# Altium PCB Arduino mini.PcbDoc
Units mil, origin at the board's own origin, x right, y up, seen from the top; angles counter-clockwise.
Board outline 805 x 805 mil, 2 copper layers (Top Layer, Bottom Layer); 9 components, 29 nets, 69 pads, 20 vias.
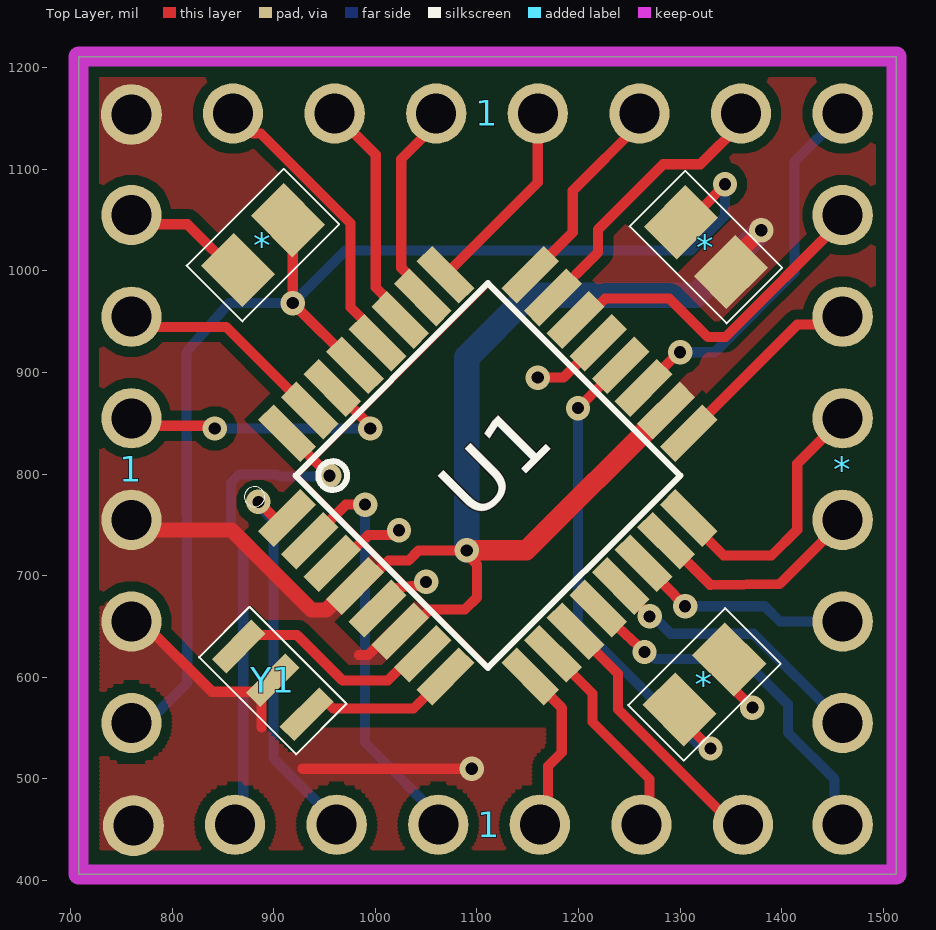
[diagram p0: Top Layer view]
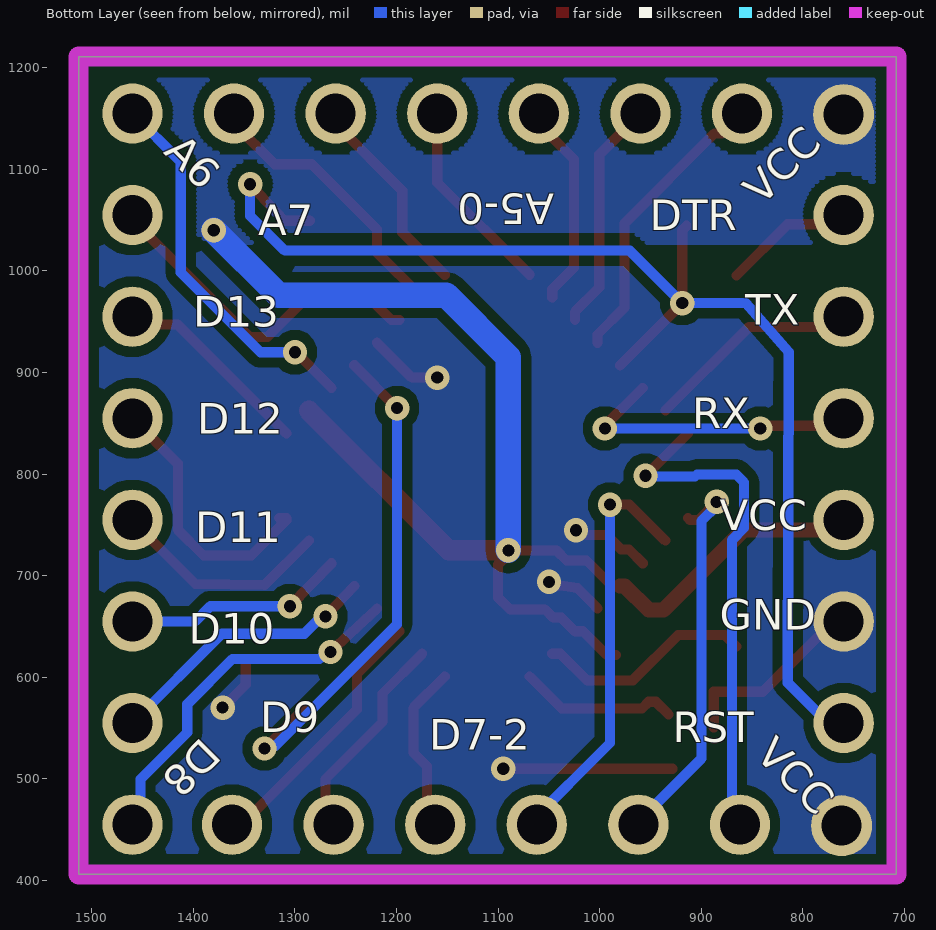
[diagram p1: Bottom Layer view, seen from below]
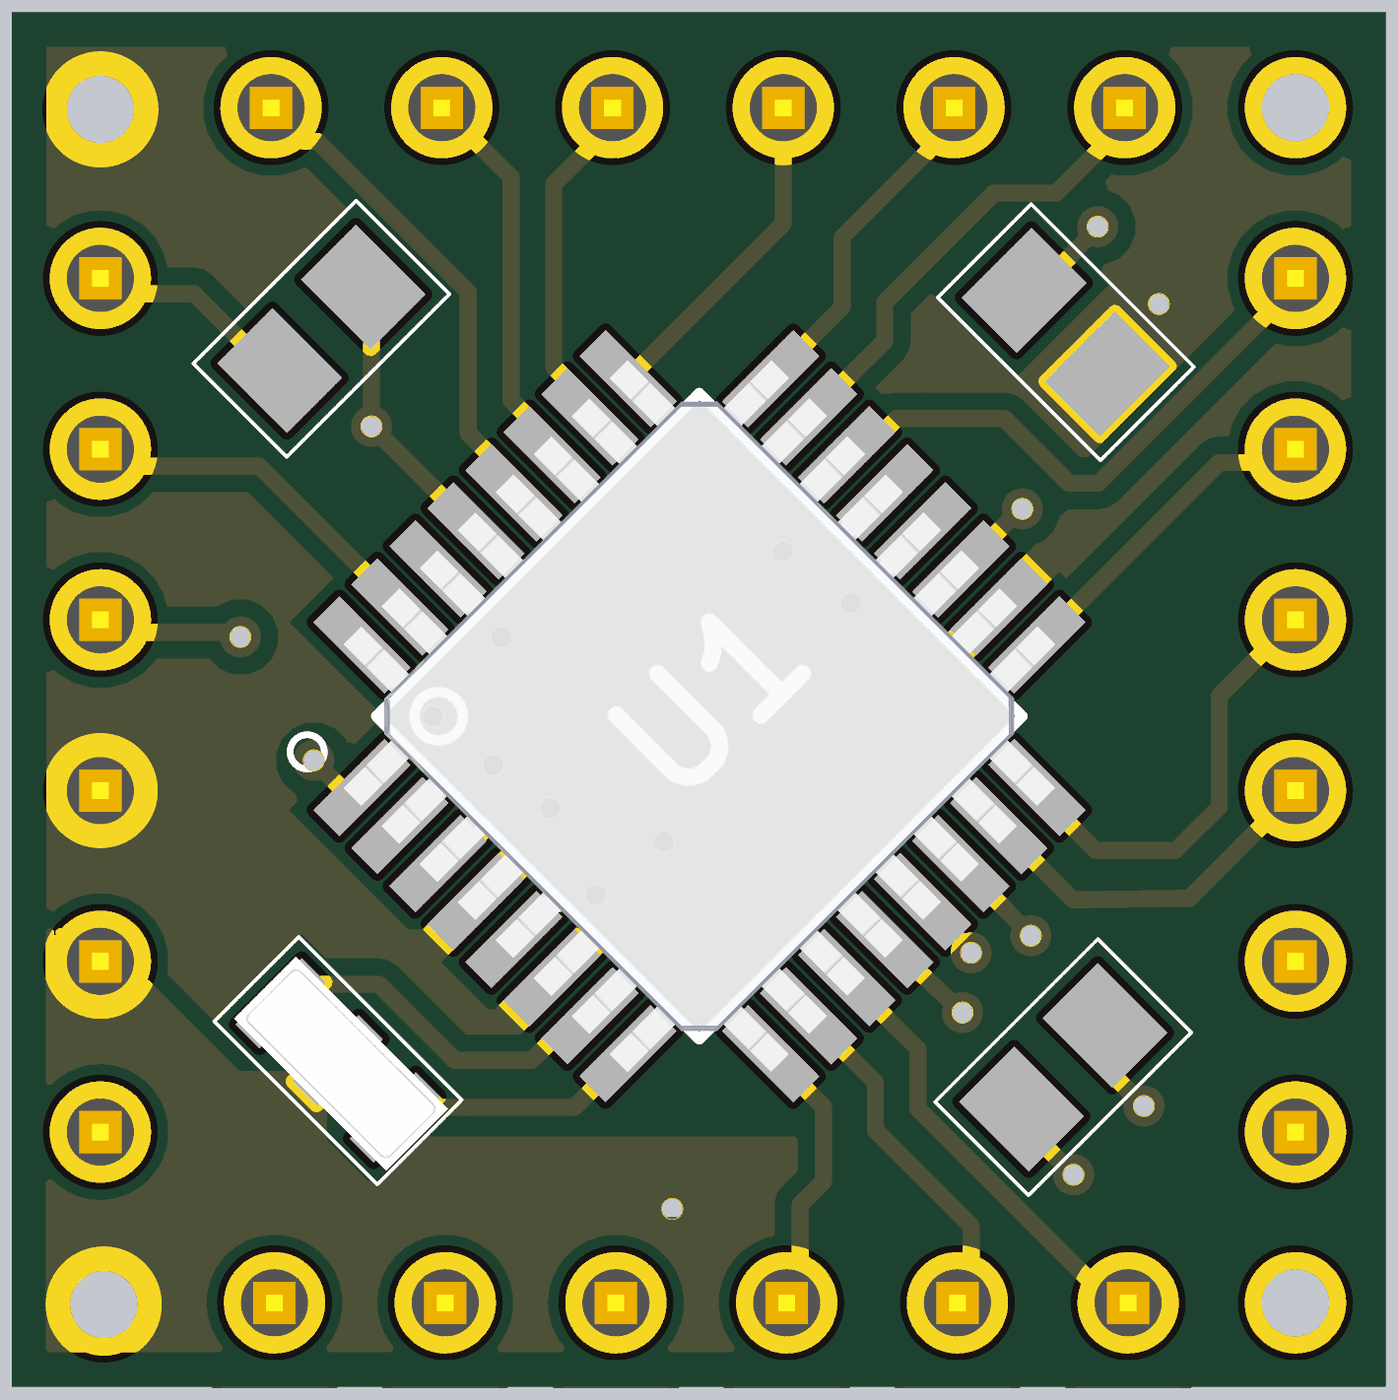
[diagram p2: 3D render of the assembled board from above, using the file's embedded part models]

## Layer stack, top to bottom
Top Solder: solder mask 1, SM-002, Dk 4
Top Layer: signal copper 1.4
Dielectric 1: dielectric 12.6, FR-4, Dk 4.8
Bottom Layer: signal copper 1.4
Bottom Solder: solder mask 1, SM-002, Dk 4

## Board outline
708,406 708,1211 1513,1211 1513,406

## Design rules (kind name [scope] priority, off if disabled: settings)
Clearance [All] p1: gap=10 ignorepadtopadclearanceinfootprint=TRUE except(0: Arc-Hole Track-Hole SMDPad-Hole THPad-Hole Via-Hole Fill-Hole Poly-Hole Region-Hole Text-Hole; 15: Arc-Arc Arc-Track Track-Track)
ComponentClearance [All] p1 off: gap=10 collisioncheckmode=3 verticalgap=10 showdistances=FALSE
Height [All] p1 off: minheight=0 maxheight=1000 prefheight=500
PolygonConnect [All] p1: connectstyle=Direct reliefconductorwidth=10 reliefentries=4 polygonreliefangle="90 Angle" airgapwidth=10
RoutingVias [All] p1: holewidth=28 width=50 viastyle="Through Hole" minholewidth=28 minwidth=50 maxholewidth=28 maxwidth=50
SolderMaskExpansion [All] p1: expansion=4 istentingtop=FALSE
Width [All] p1: maxlimit=30 minlimit=10 preferedwidth=10 minimp=50.000000 maximp=50.000000 favimp=50.000000
28 further rules are at their usual default settings.

## Classes and differential pairs
component class Arduino最小开发板: 1 * U1 Y1

## Components (designator, comment, footprint, x,y, rotation, side; value= is the part's Value field where it differs from the comment)
1 "JP" JP 1360,1155 r180 top
1 "JP" JP 760,1055 r270 top
1 "JP" JP 862,455 r0 top
* "JP-8" JP-8 1460,1155 r270 top
* "电容" 0805 1324,593 r225 top
* "电阻" 0805 1325.5,1023.5 r315 top
* "电容" 0805 889.5,1025.5 r45 top
U1 "ATMEGA328P-AU" Atmega 1110.84,798.57 r45 top
Y1 "8/16MHz" CSTCE 865.59,630.41 r315 top

## Footprints (in the part's own frame and the unit in brackets; to place one, negate y for a bottom-side part, rotate by r counter-clockwise, add the part's x,y. Pads: shape width x height; smd on the part's side, far side on the other; paste and mask are expansions set on the pad)
0805 [mm]
  rect 1.16x1.47 smd: 1(-0.88,0) 2(0.88,0)
  silkscreen extent -1.71,-0.98 1.71,0.98
Atmega [mm]
  rect 1.5x0.55 smd: 1(-4.3,2.8) 2(-4.3,2) 3(-4.3,1.2) 4(-4.3,0.4) 5(-4.3,-0.4) 6(-4.3,-1.2) 7(-4.3,-2) 8(-4.3,-2.8) 17(4.3,-2.8) 18(4.3,-2) 19(4.3,-1.2) 20(4.3,-0.4) 21(4.3,0.4) 22(4.3,1.2) 23(4.3,2) 24(4.3,2.8)
  rect 0.55x1.5 smd: 9(-2.8,-4.3) 10(-2,-4.3) 11(-1.2,-4.3) 12(-0.4,-4.3) 13(0.4,-4.3) 14(1.2,-4.3) 15(2,-4.3) 16(2.8,-4.3) 25(2.8,4.3) 26(2,4.3) 27(1.2,4.3) 28(0.4,4.3) 29(-0.4,4.3) 30(-1.2,4.3) 31(-2,4.3) 32(-2.8,4.3)
  silkscreen extent -4.75,-3.4 3.4,4, body extent -4.5,-4.5 4.5,4.5, height 1.27
CSTCE [mil]
  rect 20x55 smd: 1(0,0) 2(47.24,0) 3(94.49,0)
  silkscreen extent -20,-35 115,35, body extent -13,-26 113,26, height 28
JP [mm]
  round 1.508 hole 1: 1(0,0) 2(2.54,0) 3(5.08,0) 4(7.62,0) 5(10.16,0) 6(12.7,0)
  body extent -1.27,-1.27 13.97,1.27, height 2.59
JP-8 [mm]
  round 1.508 hole 1: 1(0,0) 2(2.54,0) 3(5.08,0) 4(7.62,0) 5(10.16,0) 6(12.7,0) 7(15.24,0) 8(17.78,0)
  body extent 1.27,-1.27 16.51,1.27, height 2.59

## Part data
U1: "AVR AVRÂ® ATmega Microcontroller IC 8-Bit 20MHz 32KB _16K x 16_ FLASH 32-TQFP _7x7_", Package="TQFP-32 Microchip", Availability=Unavailable, MF=Microchip, MP=ATMEGA328P-AU, Price=None, SnapEDA_Link=https://www.snapeda.com/parts/ATMEGA328P-AU/Microchip/view-part/44280/?ref=snap
Y1: library part 晶振-3Pin, "村田贴片"

## Free pads (board coordinates)
  round 60 hole 39.37: 2(760,1154) 2(762,454)

## Via types
v1: diameter 24, hole 12, Top Layer to Bottom Layer, tented both sides, 20 vias

## Nets (pads, with @x,y where several pads share a name; then routed paths per layer and width w, separated by ;. In a path a pad name is that pad's centre, name@x,y a point inside that pad or via, vN(x,y) a via of type N, cw(c..) or ccw(c..) an arc to the next point about the centre after c; other vN are vias at no path point)
A0: 1.1@1360,1155 U1.23 | length 279.1
  Top Layer w10: U1.23 1219.4,1018.48 1219.4,1040.89 1283.5,1105 1320,1105 1360,1145 1.1@1360,1155
A1: 1.2@1260,1155 U1.24 | length 203.3
  Top Layer w10: U1.24 1194.4,1038.02 1194.4,1079.08 1260,1144.68 1.2@1260,1155
A2: 1.3@1160,1155 U1.25 | length 196.4
  Top Layer w10: U1.25 1160,1087.14 1.3@1160,1155
A3: 1.4@1060,1155 U1.26 | length 204.1
  Top Layer w10: U1.26 1046.81,981.97 1025.55,1003.24 1025.55,1110.23 1060,1144.68 1.4@1060,1155
A4: 1.5@960,1155 U1.27 | length 230
  Top Layer w10: 1.5@960,1155 1000.55,1114.45 1000.55,983.7 1024.54,959.7 U1.27
A5: 1.6@860,1155 U1.28 | length 288.9
  Top Layer w10: 1.6@860,1155 879.76,1135.24 887.26,1135.24 975.55,1046.95 975.55,964.15 1002.27,937.43 U1.28
A6: *.1@1460,1155 U1.19 | length 363.8
  Top Layer w10: U1.19 v1@1294.08,915
  Bottom Layer w10: v1(1300,920) 1334,920 1412.5,998.5 1412.5,1107.5 *.1@1460,1155
A7: *.2@1460,1055 U1.22 | length 339.8
  Top Layer w10: U1.22 1205.16,951.69 1226.42,972.95 1289.39,972.95 1327.34,935 1344.68,935 1460,1050.32 *.2@1460,1055
D2: 1.1@862,455 U1.32 | length 512.3
  Top Layer w10: U1.32 v1(955,798.52)
  Bottom Layer w10: 1.1@870,445 870,735 858,747 858,791.96 865.75,799.71 904.34,799.71 906.23,797.81 954.3,797.81 v1(955,798.52)
D3: 1.2@962,455 U1.1 | length 394.4
  Top Layer w10: v1(885,772.71) 902.92,754.79 911.16,754.79 U1.1
  Bottom Layer w10: v1(885,772.71) 885,768.92 900,753.92 900,520 1.2@970,450
D4: 1.3@1062,455 U1.2 | length 417.4
  Top Layer w10: U1.2 970.92,770 v1@980,770
  Bottom Layer w10: v1(990,770) 990,535.32 1070,455.31 1.3@1070,445
D5: 1.4@1162,455 U1.9 | length 174.3
  Top Layer w10: U1.9 1183.52,570 1183.52,526.1 1170,512.58 1.4@1170,445
D6: 1.5@1262,455 U1.10 | length 217.6
  Top Layer w10: U1.10 1213.89,584.16 1213.89,556.11 1270,500 1.5@1270,445
D7: 1.6@1362,455 U1.11 | length 276.5
  Top Layer w10: U1.11 1238.89,603.71 1238.89,568.6 1342.74,464.76 1350.24,464.76 1.6@1370,445
D8: *.8 U1.12 | length 365.8
  Top Layer w10: U1.12 v1(1265,625)
  Bottom Layer w10: v1(1265,625) 1268.79,625 1275.79,618 1361.64,618 1406.1,573.55 1406.1,545.71 1452.12,499.69 1452.12,462.88 *.8
D9: *.7 U1.13 | length 274.7
  Top Layer w10: U1.13 v1(1270,660)
  Bottom Layer w10: v1(1270,660) 1273.79,660 1290.79,643 1372,643 *.7
D10: *.6 U1.14 | length 222.5
  Top Layer w10: U1.14 v1(1305,670)
  Bottom Layer w10: v1@1306.68,671.68 v1(1305,670) 1383.32,670 1398.32,655 *.6
D11/MOSI: *.5 U1.15 | length 220.9
  Top Layer w10: U1.15 1329.77,691 1398,691.95 1460,753.95 *.5
  Bottom Layer w10: *.5@1458.32,753.32 *.5
D12/MISO: *.4 U1.16 | length 269.4
  Top Layer w10: U1.16@1315.81,756.81 U1.16 1308.5,754.5 1343,720 1390,720 1415.32,745.32 1415.32,810.32 *.4
D13/SCK: *.3 U1.17 | length 199
  Top Layer w10: U1.17 1415.32,947.15 1452.15,947.15 *.3
DTR: 1.1@760,1055 *.1@865,1001 | length 130.1
  Top Layer w10: 1.1@760,1055 769,1046 815,1046 *.1@865.5,995.5
GND: 1.5@760,655 *.1@1348.5,617.5 pad.2@762,454 U1.3 U1.5 U1.21 Y1.2 | length 634.7
  Top Layer w10: 1.5@756.77,645 755,645 1.5@760.49,650.49 ; 1.5@760,655 770.32,655 839.45,585.86 887.86,585.86 887.86,550.73 ; 928.6,510 v1(1095,510) ; U1.3 971.32,725.86 978.83,725.86 992.97,740 v1@1015,740 ; U1.5 U1.5@1006.64,672.36 ; U1.5@1011,677 U1.5@1006.64,672.36 ; v1@1041.75,690 1043.07,691.32 1047.32,691.32 v1(1050,694) ; v1@1045.19,691.32 1022,688 U1.5@1006.64,672.36 ; v1(1160,895) 1185,895 U1.21 ; *.1@1348.5,617.5 1348.5,592.96 v1(1371.23,570.23)
  other v1: 1023.4,744.71
Net*_2: *.2@1299.5,568.5 U1.20 | length 510.3
  Top Layer w10: v1(1199.54,865) U1.20 ; *.2@1290.5,570.5 1290.5,569.5 v1(1330,530)
  Bottom Layer w10: v1(1199.54,865) 1199.54,652.27 1319.14,532.68 1327.32,532.68 v1(1330,530)
NetU1_7: U1.7 Y1.1 | length 215.1
  Top Layer w10: Y1.1 876.73,641.54 923.06,641.54 967.6,597 1012.61,597 1038.8,623.19 U1.7
NetU1_8: U1.8 Y1.3 | length 157.6
  Top Layer w10: Y1.3 944.78,575.97 951.85,575.97 958.39,569.43 1037.6,569.43 U1.8
RST: 1.6@760,555 *.1@1301,1048 *.2@914,1050 U1.29 | length 1263.3
  Top Layer w10: *.2@914.5,1044.5 918.81,1040.18 v1(918.81,968.33) U1.29 ; *.1@1285.5,1049.5 1310.72,1049.5 v1(1344.18,1085.29)
  Bottom Layer w10: 1.6@755,545 765.32,545 815,594.68 814.1,920.1 856.33,968.33 v1(918.81,968.33) 970.48,1020 1310,1020 1344.18,1054.18 v1(1344.18,1085.29)
RX: 1.3@760,855 U1.30 | length 297.5
  Top Layer w10: 1.3@755,845 757.68,847.68 839.32,847.68 v1(842,845) ; U1.30 995,847.6 v1(995,845)
  Bottom Layer w10: v1(842,845) v1(995,845)
TX: 1.2@760,955 U1.31 | length 214.6
  Top Layer w10: 1.2@755,945 853.06,945 U1.31
VCC: 1.4@760,755 *.2@1350,999 pad.2@760,1154 U1.4 U1.6 U1.18 | length 1429.1
  Top Layer w10: U1.4 988.02,690 1013.02,715 1032.82,715 1042.82,725 v1(1090,725) 1090,721.21 1100.3,710.91 1100.3,678.8 1088.22,666.72 1053.82,666.72 1045.89,658.79 1037.88,658.79 U1.6 1016.52,645.46 993.07,622 984,622 ; *.2@1334.5,1000.5 *.2@1340.5,1000.5
  Top Layer w15: 1.4@755,745 858.49,745 937.26,666.24 951.75,666.24 975.52,690 U1.4 ; *.2@1340.5,1000.5 v1(1380,1040)
  Top Layer w20: v1(1090,725) 1148.63,725 U1.18
  Bottom Layer w25: v1(1090,725) 1090,915 1151.16,976.16 1316.16,976.16 v1(1380,1040)

## Polygon pours and split planes (outlines as drawn)
GND on Top Layer "NONET_L01_P-001" (hatched Horizontal grid 4 track 5, remove dead copper, pour order 3): 925.49,798.57 1111,984.08 1297,798.57 1111,613.06
VCC on Top Layer "NONET_L01_P-001" (solid, remove dead copper, pour order 0): 710,1209 1510,1209 1510,409 710,409
GND on Top Layer "NONET_L01_P-001" (hatched Horizontal grid 4 track 5, remove dead copper, pour order 4): 838.14,585.86 887.5,585.86 887.5,550 1169.64,550 1169.64,415.8 727.64,415.8 727.64,696.36
GND on Bottom Layer "NONET_L01_P-001" (solid, remove dead copper, pour order 1): 710,1209 1510,1209 1510,409 710,409
VCC on Bottom Layer "NONET_L01_P-001" (hatched Horizontal grid 4 track 5, remove dead copper, pour order 5): 727,1191 728,1190 1493,1190 1493,1024.81 1492.19,1024 727,1024

## Keep-outs
Keep-Out Layer:
  the board outline again, w20

## Other copper
Top Layer:
  pour cut-out: 925.49,798.57 1111,984.08 1111.49,984.08 1297,798.57 1113.49,615.06 1110.84,615.06

## Silkscreen, mask and mechanical layers (free items; w line width, h text height)
Bottom Overlay:
  text "A6" at 1430.14,1116.21 h30 r45
  text "A5-0" at 1045,1076 h30 r180
  text "VCC" at 840.81,1063.26 h30 r315
  text "DTR" at 950.99,1040 h30
  text "A7" at 1336,1035 h30
  text "TX" at 857,947 h30
  text "D13" at 1400,945 h30
  text "RX" at 908.99,845 h30
  text "D12" at 1396,840 h30
  text "VCC" at 881.99,745 h30
  text "D11" at 1398,733 h30
  text "GND" at 881.99,647 h30
  text "D10" at 1404.7,632.9 h30
  text "D9" at 1333.99,546 h30
  text "D8" at 1391.79,542.14 h30 r135
  text "RST" at 927.99,536 h30
  text "D7-2" at 1168,529 h30
  text "VCC" at 847.74,522.81 h30 r45
Mechanical 1:
  lines w10: 707,1211 1514.01,1211